# Altium PCB v7-9B-Bump.PcbDoc
Units mil, origin at the board's own origin, x right, y up, seen from the top; angles counter-clockwise.
Board outline 3702 x 3936.38 mil, 2 copper layers (Top Layer, Bottom Layer); 69 components, 57 nets, 244 pads, 83 vias.
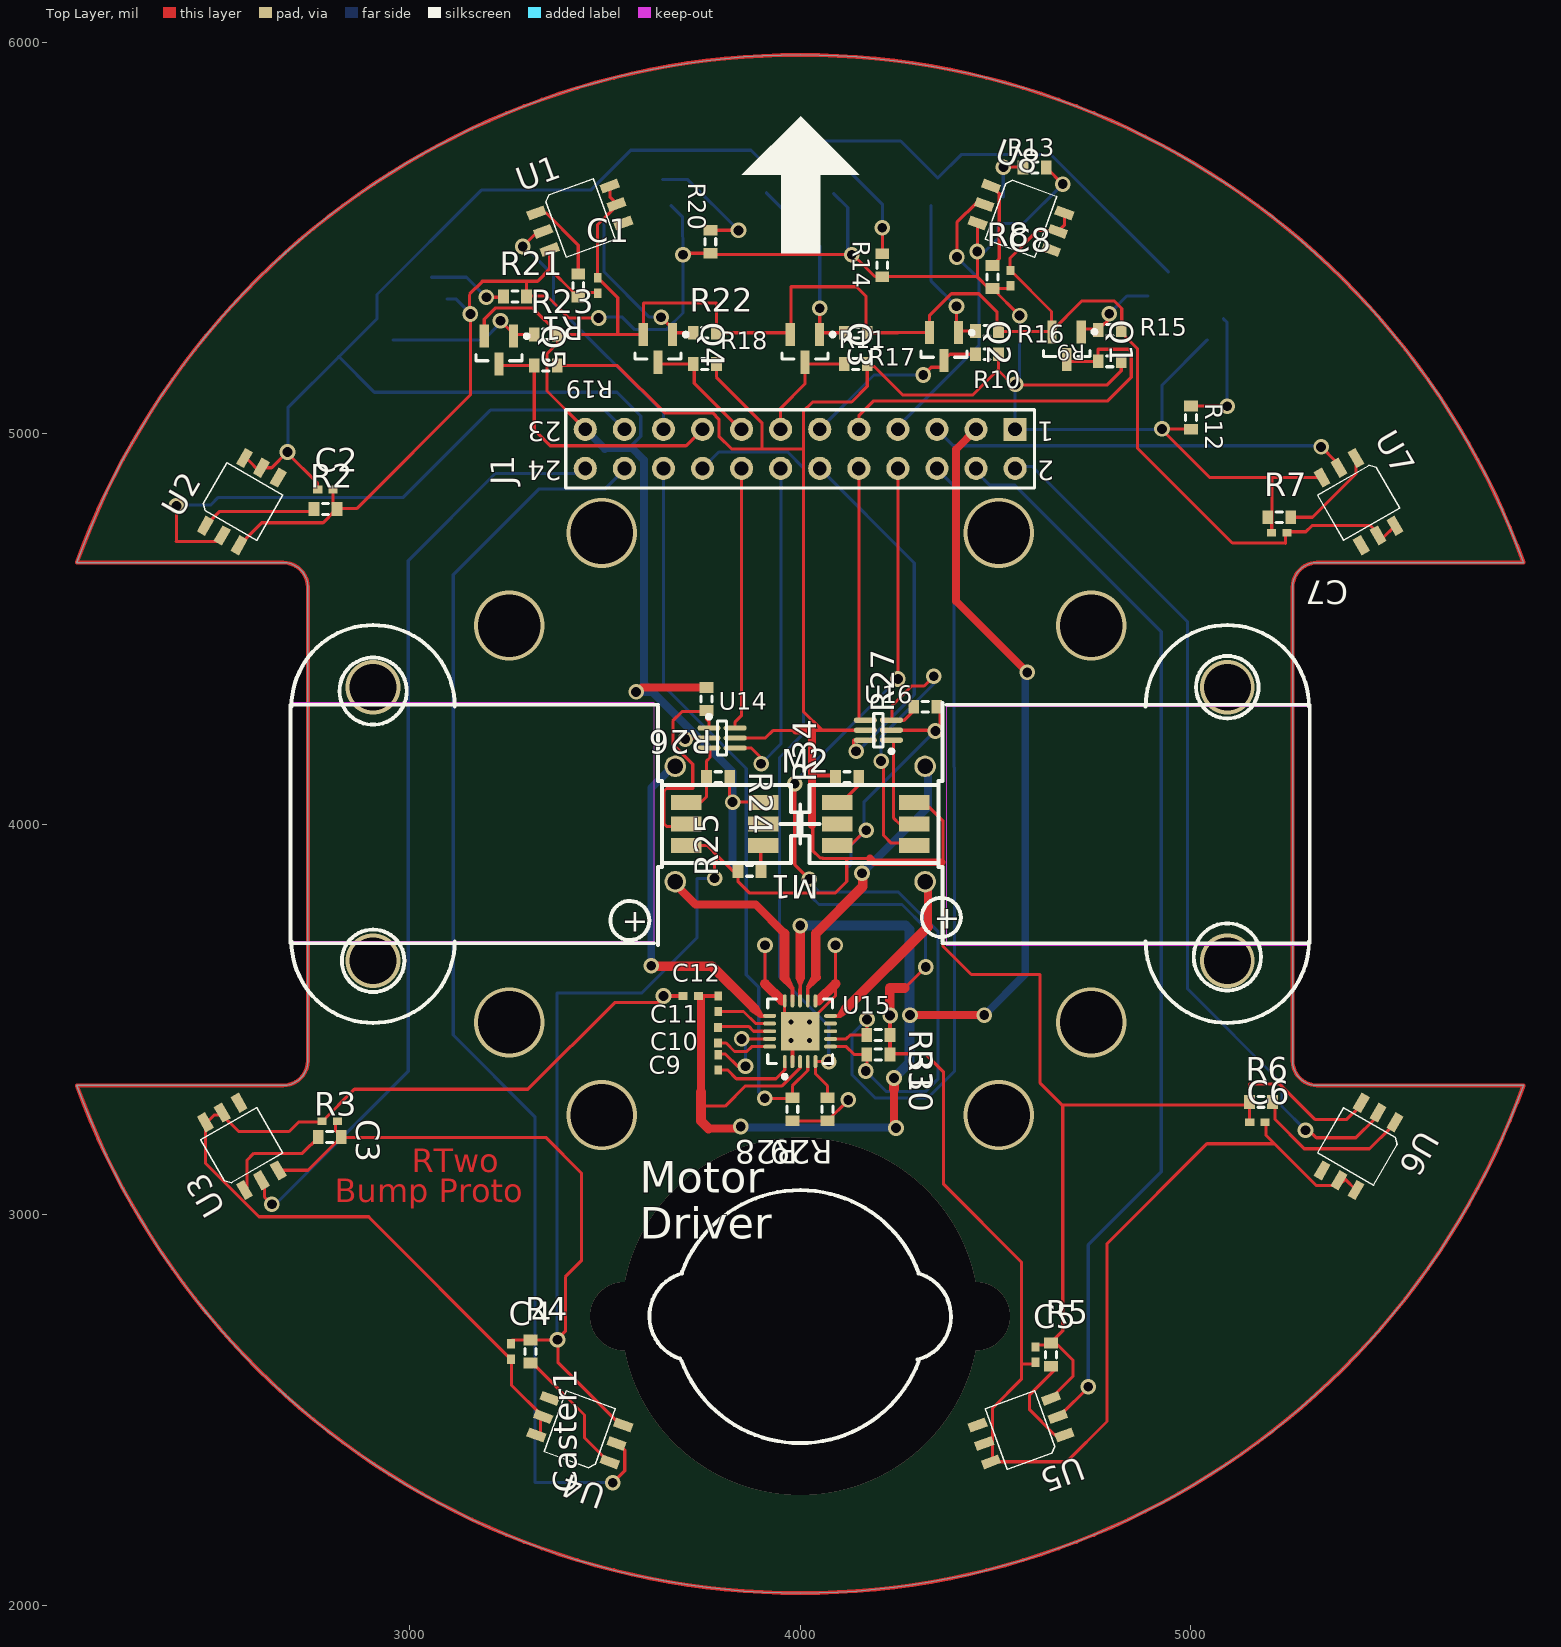
[diagram p0: Top Layer view]
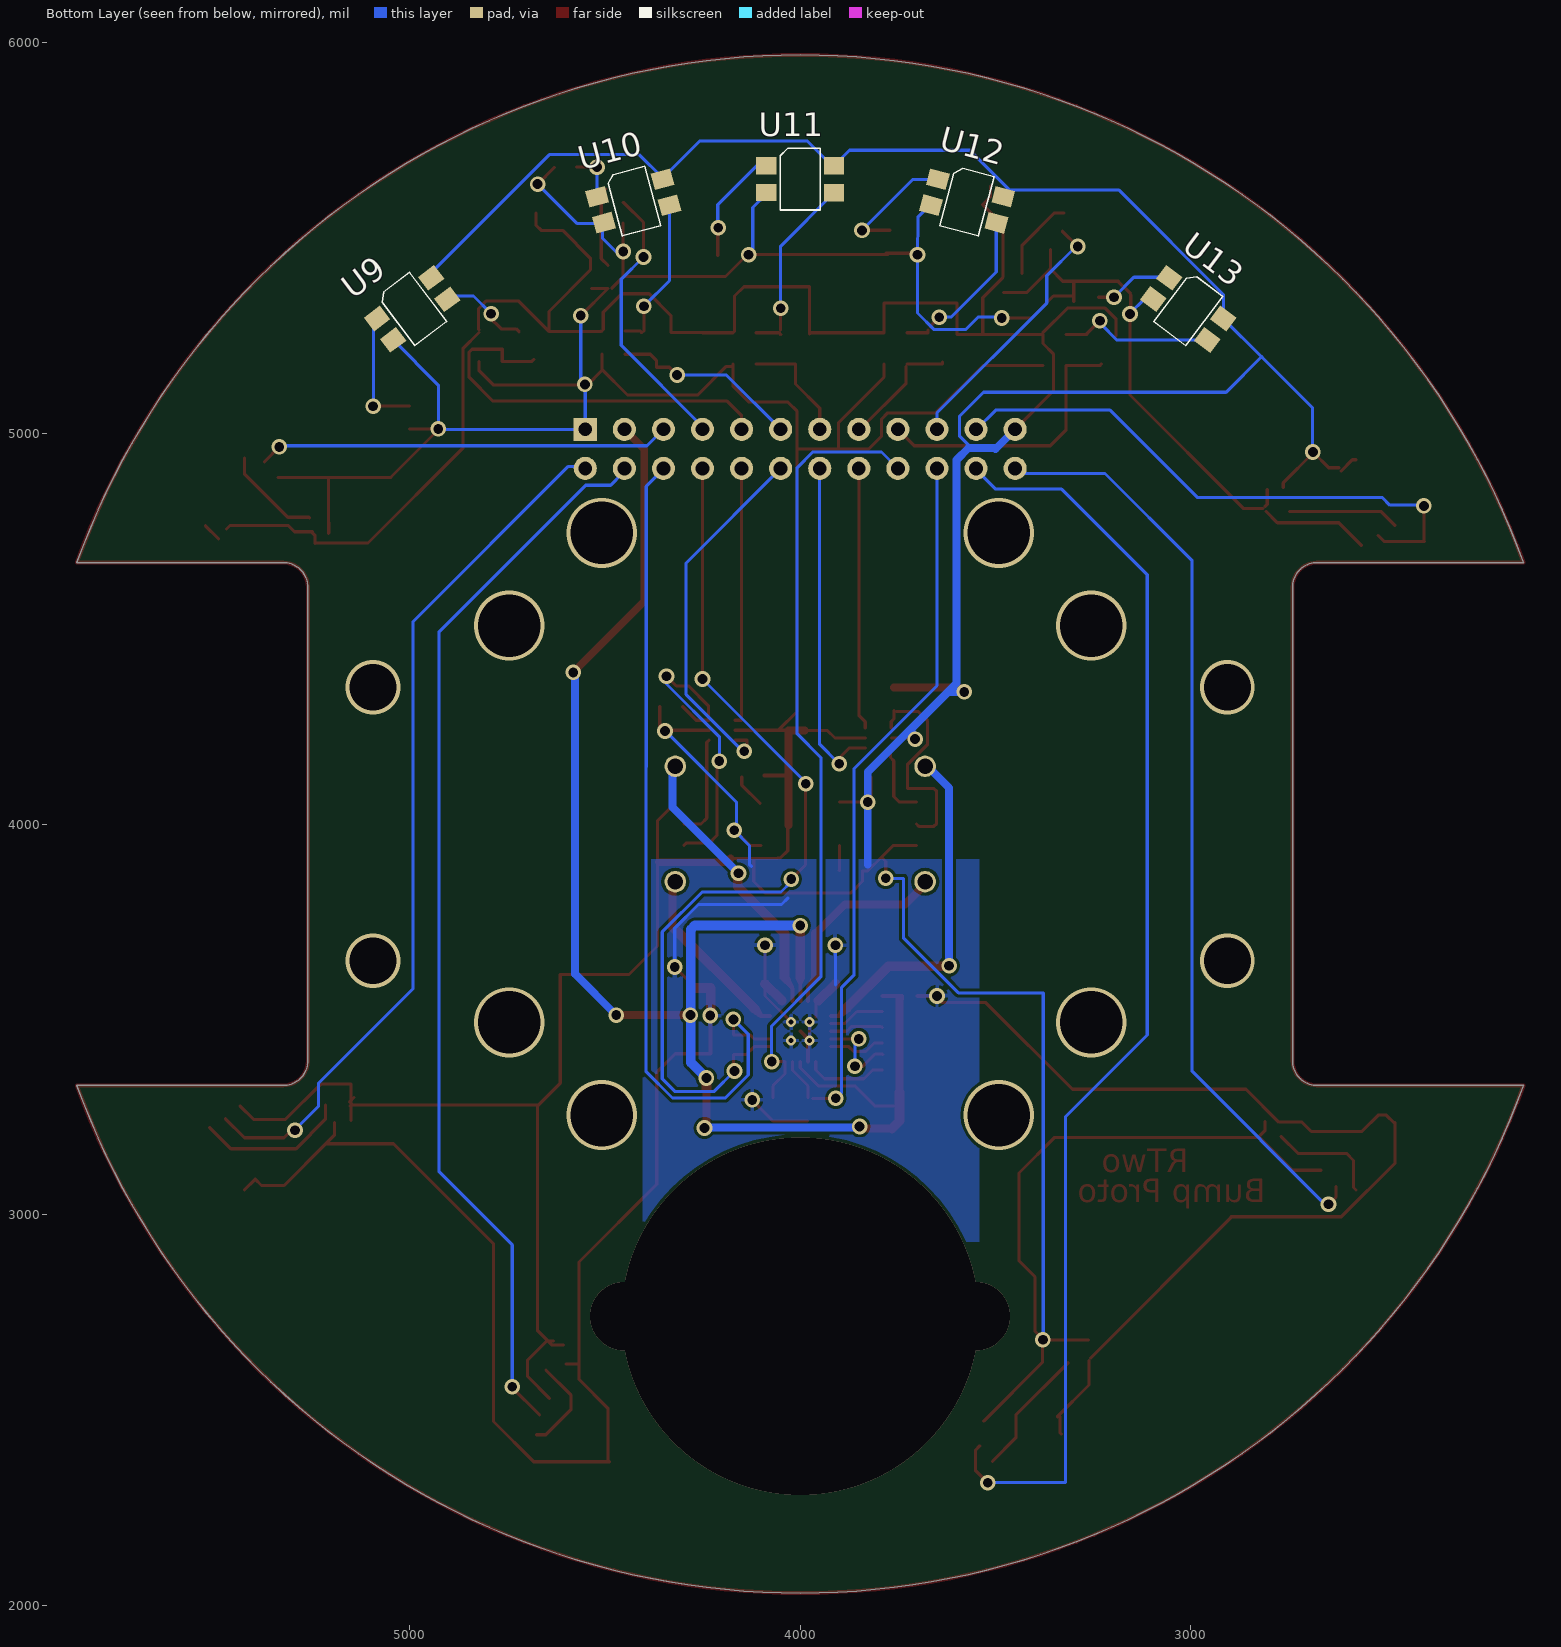
[diagram p1: Bottom Layer view, seen from below]

## Layer stack, top to bottom
Top Layer: signal copper 1.4
Dielectric: dielectric 12.6, FR-4, Dk 4.8
Bottom Layer: signal copper 1.4

## Board outline
2149,3331 2677,3331 ccw(c2677,3394) 2740,3394 2740,4606 ccw(c2677,4606) 2677,4669 2149,4669 cw(c4000,4000) 5851,4669 5323,4669 ccw(c5323,4606) 5260,4606 5260,3394 ccw(c5323,3394) 5323,3331 5851,3331 cw(c4000,4000)

## Design rules (kind name [scope] priority, off if disabled: settings)
Clearance [All] p1: gap=8
PolygonConnect [All] p1: connectstyle=Relief reliefconductorwidth=10 reliefentries=4 polygonreliefangle="90 Angle"
RoutingVias [All] p1: holewidth=25 width=40 viastyle="Through Hole" minholewidth=25 minwidth=40 maxholewidth=25 maxwidth=40
SMDNeckDown [All] p1: percent=50.000
SilkscreenOverComponentPads [All] p1: minsilkscreentomaskgap=10
SolderMaskExpansion [All] p1: expansion=4
Width "Schematic Width Constraint" [InNet('GND')] p1: maxlimit=25 minlimit=99999 preferedwidth=8 toplayer_minwidth=0 bottomlayer_minwidth=0 minimp=50.000000 maximp=50.000000 favimp=50.000000
Width "Schematic Width Constraint_12" [InNet('MOT_0B')] p2: maxlimit=25 minlimit=10 preferedwidth=20 minimp=50.000000 maximp=50.000000 favimp=50.000000
Width "Schematic Width Constraint_11" [InNet('MOT_0A')] p3: maxlimit=25 minlimit=10 preferedwidth=20 minimp=50.000000 maximp=50.000000 favimp=50.000000
Width "Schematic Width Constraint_10" [InNet('MOT1_B')] p4: maxlimit=25 minlimit=10 preferedwidth=20 minimp=50.000000 maximp=50.000000 favimp=50.000000
Width "Schematic Width Constraint_9" [InNet('MOT1_A')] p5: maxlimit=25 minlimit=10 preferedwidth=20 minimp=50.000000 maximp=50.000000 favimp=50.000000
Width "Schematic Width Constraint_8" [InNet('VBAT_SW')] p6: maxlimit=25 minlimit=10 preferedwidth=20 minimp=50.000000 maximp=50.000000 favimp=50.000000
Width MotorWidth [InNetClass('MotorNets')] p7: maxlimit=25 minlimit=8 preferedwidth=25
Width [All] p8: maxlimit=8 minlimit=8 preferedwidth=8
27 further rules are at their usual default settings.

## Classes and differential pairs
component class LineCliffSensors: Q1 Q2 Q3 Q4 Q5 R9 R10 R11 R12 R13 R14 R15 R16 R17 R18 R19 R20 R21 R22 R23 U9 U10 U11 U12 U13
component class Sensors: C1 C2 C3 C4 C5 C6 C7 C8 R1 R2 R3 R4 R5 R6 R7 R8 U1 U2 U3 U4 U5 U6 U7 U8
component class Header: J1
component class motorEncoder: C9 C10 C11 C12 Caster1 CasterBack1 M1 M2 M? R9 R10 R11 R12 R13 R14 R15 R16 R19 R20 U14 U15 U16

## Components (designator, comment, footprint, x,y, rotation, side; value= is the part's Value field where it differs from the comment)
C1 "Cap Semi" CAPC1005L 3482,5378 r270 top
C2 "Cap Semi" CAPC1005L 2785,4856 r0 top
C3 "Cap Semi" CAPC1005L 2796,3239 r0 top
C4 "Cap Semi" CAPC1005L 3260,2650 r90 top
C5 "Cap Semi" CAPC1005L 4602,2642 r90 top
C6 "Cap Semi" CAPC1005L 5170,3237 r180 top
C7 "Cap Semi" CAPC1005L 5226,4745 r180 top
C8 "Cap Semi" CAPC1005L 4538,5397 r270 top
C9 "Cap Semi" CAPC1005L 3790,3390 r270 top
C10 "Cap Semi" CAPC1005L 3789.69,3459.37 r270 top
C11 "Cap Semi" CAPC1005L 3790,3540 r270 top
C12 "Cap Semi" CAPC1005L 3720,3560 r0 top
Caster1 "non connect" "3/4\"CASTER2" 4000,2740 r180 top locked
J1 "Header 12X2" HDR2X12 4550,5010 r180 top
M1 "motorEncoder_V7b" motorEncoder_V7b 3956,4000 r180 top locked
M2 "motorEncoder_V7b" motorEncoder_V7b 4044,4000 r0 top locked
Q1 "NPN" SOT-23 4682,5224 r270 top
Q2 "NPN" SOT-23 4368,5222 r270 top
Q3 "NPN" SOT-23 4012,5217 r270 top
Q4 "NPN" SOT-23 3636,5217 r270 top
Q5 "NPN" SOT-23 3229,5213 r270 top
R1 "Res3" RESC1608L 3432,5378 r270 top
R2 "Res3" RESC1608L 2785,4806 r0 top
R3 "Res3" RESC1608L 2796,3199 r0 top
R4 "Res3" RESC1608L 3310,2650 r90 top
R5 "Res3" RESC1608L 4642,2642 r90 top
R6 "Res3" RESC1608L 5179,3289 r180 top
R7 "Res3" RESC1608L 5226,4785 r180 top
R8 "Res3" RESC1608L 4492,5400 r270 top
R9 "Res3" RESC1608L 4792,5184 r0 top
R10 "Res3" RESC1608L 4478,5202 r0 top
R11 "Res3" RESC1608L 4142,5177 r0 top
R12 "Res3" RESC1608L 5000,5040 r90 top
R13 "Res3" RESC1608L 4600,5680 r180 top
R14 "Res3" RESC1608L 4210,5430 r90 top
R15 "Res3" RESC1608L 4792,5264 r0 top
R16 "Res3" RESC1608L 4478,5262 r0 top
R17 "Res3" RESC1608L 4142,5257 r0 top
R18 "Res3" RESC1608L 3756,5177 r0 top
R19 "Res3" RESC1608L 3349,5173 r0 top
R20 "Res3" RESC1608L 3770,5490 r90 top
R21 "Res3" RESC1608L 3270,5350 r180 top
R22 "Res3" RESC1608L 3756,5257 r0 top
R23 "Res3" RESC1608L 3349,5253 r0 top
R24 "Res3" RESC1608L 3790,4120 r0 top
R25 "Res3" RESC1608L 3870,3880 r180 top
R26 "Res3" RESC1608L 3760,4320 r270 top
R27 "Res3" RESC1608L 4320,4300 r180 top
R28 "Res3" RESC1608L 3980,3270 r270 top
R29 "Res3" RESC1608L 4070,3270 r270 top
R30 "Res3" RESC1608L 4200,3410 r0 top
R31 "Res3" RESC1608L 4200,3460 r0 top
R34 "Res3" RESC1608L 4120,4120 r180 top
U1 "SFH9240-Z" SFH9240-Z 3436,5551 r20 top
U2 "SFH9240-Z" SFH9240-Z 2571,4825 r60 top
U3 "SFH9240-Z" SFH9240-Z 2571,3175 r120 top
U4 "SFH9240-Z" SFH9240-Z 3436,2449 r160 top
U5 "SFH9240-Z" SFH9240-Z 4565,2449 r200 top
U6 "SFH9240-Z" SFH9240-Z 5429,3175 r240 top
U7 "SFH9240-Z" SFH9240-Z 5429,4825 r300 top
U8 "SFH9240-Z" SFH9240-Z 4565,5551 r340 top
U9 "GP2S27TJ000F" GP2S27J0000F 4993,5318 r143 bottom
U10 "GP2S27TJ000F" GP2S27J0000F 4427,5594 r165 bottom
U11 "GP2S27TJ000F" GP2S27J0000F 4000,5650 r180 bottom
U12 "GP2S27TJ000F" GP2S27J0000F 3573,5594 r195 bottom
U13 "GP2S27TJ000F" GP2S27J0000F 3007,5318 r217 bottom
U14 "schmit trigger" DCK(R-PDSO-C6) 3800,4220 r0 top
U15 "MOTOR-A3906" QFN-20 3999.69,3469.69 r90 top locked
U16 "schmit trigger" DCK(R-PDSO-C6) 4200,4240 r180 top

## Footprints (in the part's own frame and the unit in brackets; to place one, negate y for a bottom-side part, rotate by r counter-clockwise, add the part's x,y. Pads: shape width x height; smd on the part's side, far side on the other; paste and mask are expansions set on the pad)
"3/4\"CASTER2" [mil] "3/4\" caster for board"
  silkscreen extent -386,-323 386,324
CAPC1005L [mm] "Chip Capacitor, Body 1.0x0.5mm, IPC High Density"
  rect 0.6x0.5 smd: 1(-0.5,0) 2(0.5,0)
  body extent -0.55,-0.3 0.55,0.3, height 1.3
DCK(R-PDSO-C6) [mm] "TSOP, 6-Leads, Body 2.2x1.4mm (max), Pitch 0.65mm, IPC Medium Density"
  oval 1.5x0.35 smd: 1(-0.85,0.65) 2(-0.85,0) 3(-0.85,-0.65) 4(0.85,-0.65) 5(0.85,0) 6(0.85,0.65)
  silkscreen extent -0.97,-1.1 0.3,1.5, body extent -0.7,-1.07 0.7,1.08, height 1.1
GP2S27J0000F [mil] "Phototransistor Output, Compact Reflective Photointerrupter"
  rect 52x44 smd: 1(-86.62,34.45) 2(-86.61,-33.74) 3(86.61,-34.45) 4(86.61,34.45)
  silkscreen extent -51,-79 51,79, body extent -59,-78 59,79, height 67
HDR2X12 [mm] "Connector; Header; 12x2 Position"
  rect 1.5x1.5 hole 0.9: 1(0,0)
  round 1.5 hole 0.9: 2(0,2.54) 3(2.54,0) 4(2.54,2.54) 5(5.08,0) 6(5.08,2.54) 7(7.62,0) 8(7.62,2.54) 9(10.16,0) 10(10.16,2.54) 11(12.7,0) 12(12.7,2.54) 13(15.24,0) 14(15.24,2.54) 15(17.78,0) 16(17.78,2.54) 17(20.32,0) 18(20.32,2.54) 19(22.86,0) 20(22.86,2.54) 21(25.4,0) 22(25.4,2.54) 23(27.94,0) 24(27.94,2.54)
  silkscreen extent -1.27,-1.27 29.21,3.81
motorEncoder_V7b [mm] "Precision Wire Wound Inductor, 2-Leads, Body 2.5x2.3mm, IPC Medium Density"
  rect 2x1 smd: A(1.291,1.4) C(6.291,1.4) E1(6.291,0) E2(6.291,-1.4) K(1.291,-1.4) NC(1.291,0)
  round 1.4 hole 1: M1(7,3.75) M2(7,-3.75)
  Top Layer keep-out region: 8.382,-7.874 32.004,-7.874 32.004,7.62 8.382,7.62
  silkscreen extent -1.02,-12.93 32,12.93
QFN-20 [mm] "QFN, 20-Leads, Body 4.2x4.2mm (max), Pitch 0.50mm, IPC Medium Density"
  oval 0.85x0.25 smd: 1(-1.975,1) 2(-1.975,0.5) 3(-1.975,0) 4(-1.975,-0.5) 5(-1.975,-1) 11(1.975,-1) 12(1.975,-0.5) 13(1.975,0) 14(1.975,0.5) 15(1.975,1)
  oval 0.25x0.85 smd: 6(-1,-1.975) 7(-0.5,-1.975) 8(0,-1.975) 9(0.5,-1.975) 10(1,-1.975) 16(1,1.975) 17(0.5,1.975) 18(0,1.975) 19(-0.5,1.975) 20(-1,1.975)
  rect 2.5x2.5 smd: 21(0,0)
  silkscreen extent -3.07,-2.1 2.1,2.1, body extent -2.07,-2.07 2.07,2.07, height 0.8
RESC1608L [mm] "Chip Resistor, Body 1.6x0.8mm, IPC High Density"
  rect 0.7x0.9 smd: 1(-0.75,0) 2(0.75,0)
  silkscreen extent -0.2,-0.35 0.2,0.35, body extent -0.85,-0.48 0.85,0.48, height 0.9
SFH9240-Z [mil] "Reflective Interrupter with Schmitt-Trigger"
  rect 47x24 smd: 1(-100,50) 2(-100,0) 3(-100,-50) 4(100,-50) 5(100,0) 6(100,50)
  silkscreen extent -67,-83 67,83, body extent -59,-78 59,79, height 67
SOT-23 [mm] "SOT23, 3-Leads, Body 3.0x2.5mm (max), Pitch 0.95mm, IPC Medium Density"
  rect 1.5x0.6 smd: 1(-0.9,0.95) 2(-0.9,-0.95) 3(0.9,0)
  silkscreen extent -1.02,-1.5 0.7,1.93, body extent -0.7,-1.5 0.7,1.5, height 1.2

## Part data
C1 C2 C3 C4 C5 C6 C7 C8 C9 C10 C11 C12: "Capacitor (Semiconductor SIM Model)"
Caster1: library part "Caster 3/4in", "This is just a space saver to get the caster onto the pcb"
J1: "Header, 12-Pin, Dual row"
R1 R2 R3 R4 R5 R6 R7 R8 R9 R10 R11 R12 R13 R14 R15 R16 R17 R18 R19 R20 R21 R22 R23 R24 R25 R26 R27 R28 R29 R30 R31 R34: "Resistor"

## Via types
v1: diameter 40, hole 25, Top Layer to Bottom Layer, 64 vias
v2: diameter 180/180 (per signal layer), hole 160, Top Layer to Bottom Layer, 8 vias
v3: diameter 140, hole 120, Top Layer to Bottom Layer, 4 vias
v4: diameter 25.98, hole 12.99, Top Layer to Bottom Layer, tented top, 4 vias
v5: diameter 175, hole 175, Top Layer to Bottom Layer, 2 vias
v6: diameter 915, hole 915, Top Layer to Bottom Layer, 1 vias

## Nets (pads, with @x,y where several pads share a name; then routed paths per layer and width w, separated by ;. In a path a pad name is that pad's centre, name@x,y a point inside that pad or via, vN(x,y) a via of type N, cw(c..) or ccw(c..) an arc to the next point about the centre after c; other vN are vias at no path point)
3.3V: C1.2 C2.2 C3.2 C4.2 C5.2 C6.2 C7.2 C8.2 J1.1 M1.C M2.C R1.2 R2.2 R3.2 R4.2 R5.2 R6.2 R7.2 R8.2 R9.2 R10.2 R11.2 R12.1 R13.1 R14.1 R18.2 R19.2 R20.1 R21.1 R25.2 R34.2 U1.3 U2.3 U3.3 U4.3 U5.3 U6.3 U7.3 U8.3 U9.2 U10.2 U11.2 U12.2 U13.2 U14.5 U16.5 | length 16465.3
  Top Layer w8: U2.3 2621.9,4771 2779,4771 R2.2@2808,4800 ; U3.3@2668,3114 2740.53,3114 R3.2 ; C2.2 2804.69,4818.31 R2.2@2810,4813 ; C3.2@2811,3238 2811,3215 2828,3198 3349,3198 3440,3107 3440,2882 3399,2841 3399,2702 v1@3379,2682 ; R2.2@2816,4807 2865,4807 3156,5098 v1@3156,5303 ; v1@3154,5292 3154,5353 ; 3154.53,5356.53 3186,5388 ; 3185.94,5389 3300,5389 ; C4.2@3263,2680 v1@3378,2680 ; R21.1@3299,5351 R21.1@3299.53,5351 ; R21.1 R21.1@3299.53,5351 ; R21.1@3300,5337.53 3300,5389 ; R21.1@3301,5354 R21.1@3301,5362 ; U1.3 3359.13,5420.87 3359.5,5420.5 ; 3360,5421 3359.5,5420.5 ; R19.2 3532,5173 3653,5052 3776,5052 3792,5036 3792,4992 3824,4960 3902,4960 ; v1@3379,2679 v1@3378,2680 ; v1(3379,2680) v1@3378,2680 ; v1@3380,2680 3380,2622.5 U4.3@3530.5,2472 ; C1.2@3480,5360 3420,5360 3359.5,5420.5 ; v1(3484,5295) 3408,5295 3352,5351 R21.1@3299.53,5351 ; M1.C@3702.31,3944.88 3762.12,3944.88 3792,3915 ; v1@3703.47,5460.47 R20.1 R20.1@3780,5460.47 ; R20.1@3776,5457 v1(4132,5457) v1@4148,5457 ; v1(3781,3861) 3781,3904 3792,3915 ; R18.2 3785.53,5143.47 3902,5027 3902,4960 ; U14.5 3911,4220 3930,4239 3988,4239 ; R25.2@3842,3880 R25.2 ; 3902,5016.73 3902,4960 ; 3990,4240 4043,4240 ; 4032,4124 4032,3931.7 4050.5,3913.2 4056.5,3913.2 4057.7,3912 4178.21,3912 ; 4119,3910 4119,3853 4089,3823 3871,3823 3840.47,3853.53 R25.2 ; v1@4136,5456 4191,5401 4453,5401 ; U16.5 4056,4240 4008,4288 4008,4960 ; R11.2 R11.2@4171.53,5171 ; M2.C@4323,4051 4323,4050.72 4365.15,4008.57 4365.15,3687.88 4438,3615.03 4614,3615.03 4614,3337 4672,3279 4672,3281 5146.47,3281 R6.2@5149.47,3278 ; U8.3 4453.93,5399.07 R8.2@4482,5371 ; R10.2 R10.2@4507.53,5186 ; C8.2@4533.47,5370.47 R8.2 v1(4561.47,5301) ; C5.2@4606,2667 4636,2667 4672,2703 4672,3278 ; R13.1 v1(4672,5637.53) ; R5.2@4632,2677 4649,2677 4698,2628 4698,2586.32 U5.3 ; R9.2 4821.53,5160 4784.53,5123 4545,5123 4507.53,5160.47 R10.2@4507.53,5186 ; v1@4924.6,5013.4 4926.5,5011.5 v1(4926,5011) ; v1@4925.5,5009.5 5047,4888 ; v1@4928.53,5010.47 R12.1 ; 5047,4887 5207,4887 ; R6.2@5142,3300 R6.2@5151.24,3290.76 ; R6.2@5149,3285 5149.47,3285 R6.2@5149.47,3278 ; C6.2@5149.47,3241.53 R6.2@5149.47,3278 ; R6.2 R6.2@5151.24,3290.76 ; R6.2@5152,3278 R6.2@5149.47,3278 ; R6.2@5153,3289 R6.2@5151.24,3290.76 ; 5206,4886.6 U7.3 ; C7.2 R7.2@5206.31,4771.69 ; C7.2@5207,4743 5207,4886 ; U6.3@5433,3278 5399,3244 5317,3244 5226,3335 5149.47,3335 R6.2@5149.47,3278 ; 3300,5389 3328,5389 3359.5,5420.5 ; 3792,3915 3827,3880 R25.2 ; 3902,4960 4008,4960 ; 4008,4960 4008,5056 4032,5080 4131.53,5080 4171.53,5120 R11.2@4171.53,5171 ; R11.2@4171.53,5171 4189,5171 4262,5098 4442,5098 4507.53,5163.53 R10.2@4507.53,5186
  Top Layer w10: 4032,4124 R34.2@4091.47,4124 ; 4043,4240 4056,4240
  Top Layer w20: 3988.47,4239 4030,4239 4030,3997 ; 4178.21,3912 4188.21,3902 4362,3902
  Bottom Layer w8: U13.2 3119.82,5343.18 v1@3156,5307 ; v1@3378,2682 3378,3568 3595.25,3568 3736,3708.75 3736,3861 v1(3781,3861) ; v1@3483,5297 3545,5297 3577,5265 3657.25,5265 3700,5307.75 v1(3700,5457) 3700,5500 ; U12.2@3670,5582 3699,5553 3699,5503 ; U11.2@4086,5613 4121.53,5577.47 v1@4121.53,5471.47 ; v1@4467,5460 4506,5499 U10.2@4506,5533 ; U10.2@4507,5537 4571.47,5537 v1(4672,5637.53) ; v1(4551,5125) 4551,5128 4550,5129 J1.1 v1@4922,5010 ; v1@4561.47,5133.47 v1(4561.47,5301) ; v1@4926,5013 4926,5123.06 U9.2
  other v1: 3156,5305 4453,5465
BUMP1: J1.19 U1.2 | length 672
  Top Layer w8: v1(3290,5478) U1.2@3329,5517
  Bottom Layer w8: v1@3293,5479 3369,5403 3369,5333 3650,5052 J1.19
BUMP2: J1.21 U2.2 | length 1471.7
  Top Layer w8: v1(2404,4814) 2404,4724 2403,4723 2505.6,4723 U2.2
  Bottom Layer w8: v1@2416,4816 2491,4816 2511,4836 2984,4836 ; 2985,4836 2984,4836 ; J1.21 3549,5010 3500,5059 3207,5059 2984,4836
BUMP3: J1.24 U3.2 | length 2410.2
  Top Layer w8: U3.2@2629,3072 2629,3045 v1@2648,3026
  Bottom Layer w8: v1@2647,3017 2997,3367 2997,4674 3220,4897 J1.24@3455,4897 ; J1.24@3445,4909 J1.24@3449,4909
  other v1: 2648,3027
BUMP4: J1.22 U4.2 | length 3258.9
  Top Layer w8: v1(3520,2314) 3551.05,2345.05 3551.05,2397.95 U4.2@3540.44,2408.56
  Bottom Layer w8: v1(3520,2314) 3519,2315 3321,2315 3321,3251 3112,3460 3112,4638 3331,4857 3500,4857 J1.22@3542,4899
BUMP5: J1.4 U5.2 | length 2754
  Top Layer w8: U5.2@4667,2488 v1@4739,2560
  Bottom Layer w8: J1.4 J1.4@4459,4910 ; J1.4@4455,4897 4485,4867 4549,4867 4924,4492 4924,3110 4737,2923 v1@4737,2563
  other v1: 4737,2560
BUMP6: J1.2 U6.2 | length 2246.1
  Top Layer w8: v1@5298,3215 5303,3215 5321,3197 5422,3197 U6.2@5471,3246
  Bottom Layer w8: J1.2@4548,4901 4554,4895 4573.56,4914.56 4594.44,4914.56 4991,4518 4991,3578 5233,3336 5233,3277 v1@5294,3216
  other v1: 5293,3216
BUMP7: J1.5 U7.2 | length 1055.4
  Top Layer w8: v1(5333,4965) U7.2@5371,4927
  Bottom Layer w8: J1.5 4392,4968 5330,4968 v1(5333,4965)
BUMP8: J1.7 U8.2 | length 712.2
  Top Layer w8: v1(4401,5451) 4401,5539.55 4451.45,5590 U8.2@4453,5590
  Bottom Layer w8: J1.7 4250,5017 4458,5225 4458,5394 v1(4401,5451)
CLIFF1: J1.9 Q1.3 R9.1 | length 1038.7
  Top Layer w8: J1.9 4150,5045 4187,5082 4786.07,5082 4847.31,5143.23 4847.31,5207.69 4840,5215 4762.47,5215 R9.1 4723.57,5184 4686.57,5184 Q1.3
CLIFF2: J1.11 Q2.3 R10.1 | length 554.3
  Top Layer w8: v1(4315,5149) 4335,5169 ; R10.1 4383.43,5202 Q2.3 Q2.3@4368,5169 ; 4335,5169 Q2.3@4368,5169 ; 4335,5169 Q2.3@4368,5169 ; 4335,5169 Q2.3@4368,5169
  Bottom Layer w8: J1.11 4189,5149 v1(4315,5149)
CLIFF3: J1.13 Q3.3 R11.1 | length 494.1
  Top Layer w8: J1.13 3950,5064 4012,5126 Q3.3@4012,5177 ; Q3.3@4012,5177 R11.1 ; Q3.3@4012,5177 R11.1 ; Q3.3@4012,5177 R11.1
CLIFF4: J1.15 Q4.3 R18.1 | length 307.9
  Top Layer w8: Q4.3 3636,5177 R18.1 ; R18.1@3729,5171 3729,5128 3847,5010 J1.15
CLIFF5: J1.17 Q5.3 R19.1 | length 721.5
  Top Layer w8: Q5.3 3233.57,5173 R19.1 3319.47,5008.53 3360,4968 3708,4968 J1.17
GND: C1.1 C2.1 C3.1 C4.1 C5.1 C6.1 C7.1 C8.1 C12.1 J1.23 M1.K M2.K Q1.2 Q2.2 Q3.2 Q4.2 Q5.2 R15.2 R16.2 R17.2 R22.2 R23.2 R24.2 R26.1 R27.1 R28.2 R29.2 R30.2 R31.2 U1.5 U1.6 U2.5 U2.6 U3.5 U3.6 U4.5 U4.6 U5.5 U5.6 U6.5 U6.6 U7.5 U7.6 U8.5 U8.6 U9.4 U10.4 U11.4 U12.4 U13.4 U14.2 U15.2 U15.11 U15.15 U15.21 U16.2 | length 18474.9
  Top Layer w8: U3.6 2477.7,3132.3 2615,2995 2897,2995 ; U3.6@2479,3234 2500,3255 2521,3255 2563,3213 2692.05,3213 2716.05,3237 2775.06,3237 2859.22,3321.16 3303.16,3321.16 3525,3543 3637,3543 v1@3647,3553 ; U2.6@2578,4932 2587,4932 U2.5@2616,4903 ; U2.5 2647.34,4911.6 2686.37,4950.63 2764,4873 C2.1@2764,4861 ; 2896.5,2993.5 C4.1@3257,2633 ; Q5.2 3191.6,5291.85 3219.75,5320 3316,5320 R23.2@3379,5257 ; C4.1@3261,2627 3261,2564.23 U4.5 ; U4.6@3332,2439 3335,2442 U4.5@3335,2483 ; J1.23 3352,5108 3352,5203 3378.53,5229.53 R23.2 3598.6,5253 3598.6,5333 3785.53,5333 R22.2 3972.84,5257 3976,5253.84 3976,5375 4144,5375 4168,5351 R17.2@4168,5260 ; C1.1@3481,5400 3481,5533 3533,5585 3512.87,5605.13 U1.6 ; C1.1 3533,5346.69 3533,5253 ; v1(3706,4217.25) 3700.75,4217.25 3698,4220 U14.2 ; R24.2 3819.53,4066.47 v1@3828,4058 ; v1(3827,4056) M1.K@3899,4056 ; v1(3910,3690) 3910,3591 3960,3541 U15.21@3960,3506 ; U15.21@3975.91,3493.15 3976.06,3493 v4(3976.06,3446.06) ; R28.2@3982,3240 4069.53,3240 R29.2 4123,3293.47 v1(4123,3294) ; v4(4023.31,3493.31) 4090,3560 4090,3591 v1(4090,3690) ; M2.K@4100.84,3944.88 4127.88,3944.88 4167,3984 v1(4169,3984) ; R17.2 4250,5257 4250.43,5257.43 Q2.2 4330.6,5300.85 4386.75,5357 4457.01,5357 4504,5310.01 R16.2@4504,5266 ; R30.2@4229.53,3412 4320,3412 4367,3365 4367,3078 ; 4266.85,3580 v1(4321,3634.15) ; 4367,3077.32 4367,3078 ; R16.2 4509.53,5260 4642,5260 4720,5338 4804.25,5338 4823,5319.25 4823,5265.47 R15.2 ; C8.1@4537,5419 4537,5448 4608,5519 4663,5519 4676.07,5532.07 U8.6 ; C8.1 4643,5311.69 Q1.2@4643,5264 ; C5.1@4599,2618 4566,2618 ; 4681,2367.81 U5.6 4492.12,2371.8 4492.12,2505.12 4566,2579 4566,2618 ; 4682,2368 4785,2471 4785,2926 5040.82,3181.82 5213.82,3181.82 ; R15.2@4822,5257.94 4863.31,5216.63 4863.31,4961.69 5106,4719 5241,4719 ; C6.1@5192,3236 5192,3203.63 5213.82,3181.82 ; 5242,4718 5242,4739 C7.1@5250,4747 ; C7.1@5248,4748 5294,4748 5310,4764 5459,4764 U7.5@5468,4755 ; U6.6 5394.7,3091 5378.75,3075.05 5320.59,3075.05 5213.82,3181.82 ; U7.5@5488.15,4729.25 U7.6 ; 4367,3078 4566,2879 4566,2618
  Top Layer w10: v1(3650,3560) C12.1 ; U15.2 3980,3450 U15.21 ; R30.2@4229.53,3412 R31.2 4229.53,3509.53 v1(4230,3510) ; U16.2 4359.53,4240 R27.1@4359.53,4300
  Top Layer w20: v1(3580,4338) 3580,4334 3595.53,4349.53 R26.1
  Top Layer w25: 3910,3591 3953,3548 ; 4047,3548 4090,3591 ; v1@4229,3513 4229,3580 4266.85,3580
  Bottom Layer w8: v1@2689,4955 2689,5065.29 2818.86,5195.15 ; 2818,5196 2818.86,5195.15 ; 2820,5195 2910.14,5104.85 ; 2820.86,5195.15 2818.86,5195.15 ; 2911,5105 3531,5105 3592,5044 3592,4992 3562.47,4962.47 3560,4960 ; U13.4@2917.1,5293.1 U13.4 ; 3500,4960 3502.47,4960 ; v1(3706,4217.25) 3706,4234 3713,4241 ; 3910,3588 v1(3910,3690) ; 4032,3810 4048,3794 4260.37,3794 4321,3733.37 v1(4321,3634.15) ; 4125,3892 4130,3897 4130,3945 v1(4169,3984) 4168,3984 4163,3989 4163,4056 4331.47,4224.47 4346,4224.47 v1(4346,4238) ; U9.4@4942,5412.78 4641.78,5713 4412,5713 4352,5653 4257,5748 3982,5748 3916,5682 3874,5724 3566,5724 3464,5622 3184,5622 2917.1,5355.1 U13.4 ; 2818.86,5195.15 U13.4
  Bottom Layer w20: J1.23 3500,4960 ; 3502.47,4962.47 3562.47,4962.47 3569,4962.47 3600,4931.47 3600,4360 3622,4338 ; v1(3580,4338) 3622,4338 ; 3827,3896 v1(3827,4056) ; v1@3827,4064 3827,4133 3622,4338
  other v1: 2688,4952
  other v4: 4023.31,3446.06 3976.06,3493.31
MOT0_PWMA: J1.20 R28.1 U15.4 | length 1887
  Top Layer w8: v1(3909,3298) R28.1@3968,3298 ; R28.1 3980,3330 4019.37,3369.37 U15.4
  Bottom Layer w8: J1.20 3650,4354.02 3862,4142.02 3862,3614 3894,3582 3894,3313 v1(3909,3298)
MOT0_PWMB: J1.18 R29.1 U15.5 | length 2029.6
  Top Layer w8: R29.1 4070,3330 4039.06,3360.94 U15.5 4073.93,3391.93 v1@4074,3392
  Bottom Layer w8: J1.18 3792,4952 3968,4952 4008,4912 4008,4231 3947,4170 3947,3609 4073,3483 v1(4073,3392)
MOT1_A: M2.M2 U15.10 | length 448
  Top Layer w10: U15.10 4099.06,3509.06 4120,3530
  Top Layer w20: 4327,3737 M2.M2@4327,3841
  Top Layer w25: 4120,3530 4327,3737
MOT1_B: M2.M1 U15.12 | length 739.5
  Top Layer w10: U15.12 4019.37,3579.37 4040,3600 4040,3610
  Top Layer w25: 4040,3610 4040,3720 4160,3840 4160,3874 4160,3880 4158,3878 v1(4158,3874)
  Bottom Layer w20: v1(4158,3874) 4327,4043 M2.M1@4327,4139
  Bottom Layer w25: v1(4158,3874) 4158,3878 v1@4160,3880
MOT1_PWMA: J1.8 R30.1 U15.6 | length 2304.2
  Top Layer w8: v1(3986,4103) 3986,3896 v1(4023,3859) ; U15.6 4117.68,3430.32 4138,3410 R30.1 4170.47,3370.47 v1(4168,3368) ; v1(4250,4371) J1.8
  Bottom Layer w8: v1@3985,4106 v1(4250,4371) ; v1(4023,3859) 4023,3852 4049,3826 4251,3826 4353,3724 4353,3348 4320,3315 4221,3315 v1(4168,3368)
MOT1_PWMB: J1.6 R31.1 U15.7 | length 2172.4
  Top Layer w8: U15.7 4118.15,3450 4128.15,3460 4171,3460 v1(4171,3500)
  Bottom Layer w8: v1(4171,3500) 4133,3462 4133,3357.75 4191.75,3299 4326.63,3299 4395,3367.37 4395,4145 4394,4146 ; J1.6@4348,4911 4348,4910 4394,4864 4394,4147
MOT_0A: M1.M2 U15.16 | length 890.1
  Top Layer w10: 3880,3530 3900.94,3509.06 U15.16
  Top Layer w25: v1@3618,3636 3774,3636 3880,3530
  Bottom Layer w20: v1(3619,3637) 3619,4092.23 M1.M2@3674.41,4147.64
MOT_0B: M1.M1 U15.14 | length 512.9
  Top Layer w10: 3960,3600 3980,3580 U15.14
  Top Layer w20: M1.M1@3673,3853 3732,3794 3886,3794 3960,3720
  Top Layer w25: 3960,3610 3960,3720
NetC9_1: C9.1 U15.19 | length 231.5
  Top Layer w8: C9.1@3788,3409.69 3789.31,3411 3809,3411 3840,3380 v1(3860,3380) ; v1(3850,3450) U15.19
  Bottom Layer w8: v1(3850,3450) 3860,3440 v1(3860,3380)
NetC9_2: C9.2 U15.1 | length 211.4
  Top Layer w8: C9.2@3789,3370.31 3814.43,3370.31 3836.75,3348 3938,3348 3960.32,3370.32 U15.1
NetC10_1: C10.1 U15.18 | length 138.2
  Top Layer w8: C10.1@3790,3479.06 3792.94,3482 3868,3482 3880.31,3469.69 U15.18
NetC10_2: C10.2 U15.20 | length 146.3
  Top Layer w8: C10.2 3810.31,3439.69 3832,3418 3863.25,3418 3875.57,3430.32 U15.20
NetC11_2: C11.2 U15.17 | length 144.7
  Top Layer w8: C11.2 3855.04,3520.31 3885.98,3489.37 U15.17
NetM1_A: M1.A R25.1 | length 64.2
  Top Layer w8: M1.A@3899.16,3944.88 3899.16,3881.84 R25.1@3900,3881
NetM2_A: M2.A R34.1 | length 86.3
  Top Layer w8: M2.A@4103,4053 4149.53,4099.53 R34.1
NetQ1_1: Q1.1 R15.1 U9.3 | length 221.4
  Top Layer w8: Q1.1 4726.97,5267 4765.47,5267 4797,5298.53 4797,5300 v1(4791,5306)
  Bottom Layer w8: v1(4791,5306) 4836,5351 U9.3@4890,5351
NetQ2_1: Q2.1 R16.1 U10.3 | length 393.3
  Top Layer w8: Q2.1@4400,5262 v1(4400,5325) ; Q2.1 4409.97,5262 R16.1
  Bottom Layer w8: U10.3 4334.42,5390.58 v1(4400,5325)
NetQ3_1: Q3.1 R17.1 U11.3 | length 473.1
  Top Layer w8: Q3.1 4053.97,5257 R17.1 ; Q3.1@4050,5264 v1(4050,5320)
  Bottom Layer w8: U11.3 4050,5478.94 v1(4050,5320)
NetQ4_1: Q4.1 R22.1 U12.3 | length 400.4
  Top Layer w8: v1(3644,5297) 3667,5274 Q4.1@3667,5272 ; Q4.1@3673.4,5264.6 3673.4,5257 R22.1
  Bottom Layer w8: U12.3 3498.25,5412.75 3614,5297 v1@3630,5297
NetQ5_1: Q5.1 R23.1 U13.3 | length 391.6
  Top Layer w8: v1(3233,5288) 3266.4,5254.6 3266.4,5253 R23.1
  Bottom Layer w8: U13.3 3189.36,5238.36 v1@3231,5280
NetR1_1: R1.1 U1.1 | length 213.4
  Top Layer w8: U1.1 3349.31,5563.78 3432,5481.09 R1.1@3432,5409
NetR2_1: R2.1 U2.1 | length 285.5
  Top Layer w8: U2.1 2514.3,4800 R2.1@2748,4800
NetR3_1: R3.1 U3.1 | length 288.5
  Top Layer w8: U3.1 2584,3069.7 2584,3139 2602,3157 2726,3157 R3.1@2769,3200
NetR4_1: R4.1 U4.1 | length 332.6
  Top Layer w8: R4.1@3314.36,2621.36 3448,2487.72 3448,2429 U4.1@3508,2369
NetR5_1: R5.1 U5.1 | length 242.4
  Top Layer w8: R5.1@4650.5,2602.5 4587,2539 4587,2500.91 4650.91,2437 U5.1@4675,2437
NetR6_1: R6.1 U6.1 | length 386.4
  Top Layer w8: R6.1@5215,3281 5215,3244 5290,3169 5457,3169 U6.1@5511,3223
NetR7_1: R7.1 U7.1 | length 252.7
  Top Layer w8: R7.1@5256,4783 R7.1@5256,4784 ; R7.1@5257,4785 5311,4785 5422.3,4896.3 U7.1
NetR8_1: R8.1 U8.1 | length 207.7
  Top Layer w8: R8.1 4509.22,5446.74 4509.22,5612.78 U8.1@4497,5625
NetR12_2: R12.2 U9.1 | length 314.7
  Top Layer w8: R12.2 v1@5087.53,5069.53
  Bottom Layer w8: U9.1 5092,5284.29 v1@5092,5070
  other v1: 5093,5069
NetR13_2: R13.2 U10.1 | length 128.3
  Top Layer w8: v1(4520,5681) R13.2@4572,5681
  Bottom Layer w8: U10.1 4519.58,5680.58 v1(4520,5681)
NetR14_2: R14.2 U11.1 | length 296.6
  Top Layer w8: R14.2@4211,5455 4211,5526 v1@4211,5535
  Bottom Layer w8: U11.1 4111.55,5684.45 4211,5585 v1@4211,5534
  other v1: 4210,5526
NetR20_2: R20.2 U12.1 | length 314.5
  Top Layer w8: R20.2 v1@3837.53,5519.53
  Bottom Layer w8: U12.1 3711.31,5649.69 v1@3841,5520
  other v1: 3842,5519
NetR21_2: R21.2 U13.1 | length 201.1
  Top Layer w8: v1(3197,5348) R21.2@3237,5348
  Bottom Layer w8: U13.1@3057,5399 3146,5399 v1(3197,5348)
QEI_0A: J1.16 U14.6 | length 671.3
  Top Layer w8: U14.6 3833.46,4261.46 3850,4278 J1.16
QEI_0A_ANALOG: M1.E1 R26.2 U14.1 | length 547.1
  Top Layer w8: M1.E1@3702.31,4000 3696.31,3994 3658,3994 3650.94,4001.06 3650.94,4083.94 3658,4091 3725.01,4091 3725.01,4152.99 3674,4204 3674,4264 3698,4288 R26.2@3753,4288 ; R26.2 3760,4269 3767,4262 U14.1@3767,4246
QEI_0B: J1.14 U14.4 | length 868.2
  Top Layer w8: U14.4 3874.59,4194.41 3900,4169 v1(3900,4154)
  Bottom Layer w8: v1@3901,4155 3951,4205 3951,4909 J1.14
QEI_0B_ANALOG: M1.E2 R24.1 U14.3 | length 190.5
  Top Layer w8: M1.E2@3703,4056 3746,4056 3760.47,4070.47 R24.1 3760.47,4161.47 3769,4170 U14.3@3769,4194
QEI_1A: J1.12 U16.6 | length 1056.6
  Top Layer w8: v1(4143,4186) 4143,4182 v1@4136,4175 ; U16.6 4136,4214.41 ; v1@4136,4175 4136,4214.41 ; v1@4136,4175 4136,4214.41 ; v1@4136,4175 4136,4214.41
  Bottom Layer w8: J1.12 4292,4668 4292,4331 4143,4182 v1(4143,4186)
QEI_1A_ANALOG: M2.E1 U16.1 | length 267.4
  Top Layer w8: U16.1@4233,4215 4239,4209 4239,4015 4254,4000 M2.E1@4297.69,4000
QEI_1B: J1.10 U16.4 | length 1949.8
  Top Layer w8: U16.4 U16.4@4150,4265.59 ; U16.4@4150,4265.59 J1.10 ; U16.4@4150,4265.59 J1.10 ; U16.4@4150,4265.59 J1.10
QEI_1B_ANALOG: M2.E2 R27.2 U16.3 | length 817.9
  Top Layer w8: v1(4207,4161) 4213,4155 4213,3971 4233,3951 4291.58,3951 M2.E2@4297.69,3944.88 ; U16.3 4266.06,4265.59 4300.47,4300 R27.2@4300,4300.47 ; U16.3@4235,4266 4235,4303 4285,4353 4317,4353 v1(4342,4378)
  Bottom Layer w8: v1(4207,4161) 4207,4223.37 4342,4358.37 v1(4342,4378)
VBAT_SW: C11.1 C12.2 J1.3 U15.3 U15.13 | length 4065.5
  Top Layer w8: 3747,3278 3808,3278 3860,3330 3953.81,3330 4000,3376.19 4000,3391.62 U15.3
  Top Layer w9.84: C12.2 3739.69,3552 C12.2@3746,3552
  Top Layer w10: C12.2 3740,3559.69 C11.1 ; U15.13 4000,3610
  Top Layer w20: C12.2@3746,3552 3746,3314 3747,3313 3747,3278 ; 3765,3221 3843,3221 v1(3848,3226) ; 4240,3317 4240,3227 v1(4245,3222) ; v1(4281,3511) v1(4471,3511) ; J1.3 4399,4959 4399,4570 v1(4581,4388)
  Top Layer w25: 3746,3314 3746,3240 3765,3221 ; 4000,3610 v1(4000,3740) ; 4240,3321 v1(4240,3350)
  Bottom Layer w20: v1(3848,3226) 3848,3223 4244,3223 v1(4245,3222) ; v1(4471,3511) 4576,3616 4576,4383 v1(4581,4388)
  Bottom Layer w25: v1(4000,3740) 4270,3740 4280,3730 4280,3390 v1(4240,3350)
pads on no net: M1.NC M2.NC U1.4 U2.4 U3.4 U4.4 U5.4 U6.4 U7.4 U8.4 U15.8 U15.9
copper on no net: | length 14567.9
  Top Layer w10: 2149,3331 ccw(c4000,4000) 5851,3331 5323,3331 cw(c5323,3394) 5260,3394 5260,4606 cw(c5323,4606) 5323,4669 5851,4669 ccw(c4000,4000) 2149,4669 2677,4669 cw(c2677,4606) 2740,4606 2740,3394 cw(c2677,3394) 2677,3331 2149,3331
  other v2: 3492,3255.12 4508,3255.12 3255,3492.13 4745,3492.13 3255,4507.87 4745,4507.87 3492,4744.88 4508,4744.88
  other v3: 2907,3650 5093,3650 2907,4350 5093,4350
  other v5: 3550,2740 4450,2740
  other v6: 4000,2740

## Polygon pours and split planes (outlines as drawn)
GND on Bottom Layer "Bottom Layer-gnd" (solid, pour order 1000): 3541.36,3909.57 4402.36,3909.57 4402.36,2930.57 3541.36,2930.57

## Other copper
Top Layer:
  region net VBAT_SW: 3988,3609 3988,3605 3995,3590 4005,3590 4012,3605 4012,3609
  region net MOT1_B: 4028,3610 4016,3583 4025,3578 4052,3604 4052,3610
  region net MOT_0B: 3972,3609 3984,3582 3975,3577 3948,3603 3948,3609
  region net MOT_0A: 3888,3539 3893,3535 3904,3514 3904,3504 3896,3504 3871,3521
  region net MOT1_A: 4112,3539 4107,3535 4096,3514 4096,3504 4104,3504 4129,3521
  text "RTwo" at 3006,3109 h60
  text "Bump Proto" at 2809,3032 h60

## Silkscreen, mask and mechanical layers (free items; w line width, h text height)
Top Overlay:
  circle w10: c3564,3753 r50
  circle w10: c4361,3761 r50
  region: 4001,5811 3851,5661 3951,5661 3951,5461 4051,5461 4051,5661 4151,5661
  lines w10: 3950,4000 4050,4000 ; 4000,3950 4000,4050
  text "+" at 4342,3732 h60
  text "+" at 3543,3724 h60
  text "Motor" at 3590,3056 h80
  text "Driver" at 3590,2939 h80
Mechanical 1:
  circle w10: c5040,2830 r160
  circle w10: c4000,4000 r1850
  lines w5: 1610,4000 7540,4000 ; 4000,810 4000,6740
Mechanical 3:
  lines w10: 3802.69,3530.69 3815.75,3515.45 3815.69,3538.69
Mechanical 4:
  region: 2050,4430 cw(c2070,4430) 2070,4450 ccw(c2070,4480) 2100,4480 2100,4580 cw(c2200,4580) 2200,4680 2400,4680 cw(c2400,4580) 2500,4580 2500,3379.76 cw(c2400,3379.76) 2400,3279.76 2200,3279.76 cw(c2200,3379.76) 2100,3379.76 2100,3480 ccw(c2070,3480) 2070,3510 cw(c2070,3530) 2050,3530
  region: 5950,3570 cw(c5930,3570) 5930,3550 ccw(c5930,3520) 5900,3520 5900,3420 cw(c5800,3420) 5800,3320 5600,3320 cw(c5600,3420) 5500,3420 5500,4620.24 cw(c5600,4620.24) 5600,4720.24 5800,4720.24 cw(c5800,4620.24) 5900,4620.24 5900,4520 ccw(c5930,4520) 5930,4490 cw(c5930,4470) 5950,4470
Mechanical 6:
  lines w250: 3073,2253 5073,2253
Mechanical 9:
  lines w10: 4128,5577 4128,5579

## Text inside footprints (layer, text, board x,y; h text height)
J1: Top Overlay "1" at 4650,5030 h50 r180; Top Overlay "2" at 4650,4930 h50 r180; Top Overlay "23" at 3390,5030 h50 r180; Top Overlay "24" at 3390,4930 h50 r180